# Altium PCB BLDC controller.PcbDoc (part 1 of 2)
Units mm, origin at the board's own origin, x right, y up, seen from the top; angles counter-clockwise.
Board outline 102.51 x 103.12 mm, 2 copper layers (Top Layer, Bottom Layer); 116 components, 83 nets, 325 pads, 163 vias.
Unrouted connection lines stored in the file: 1.
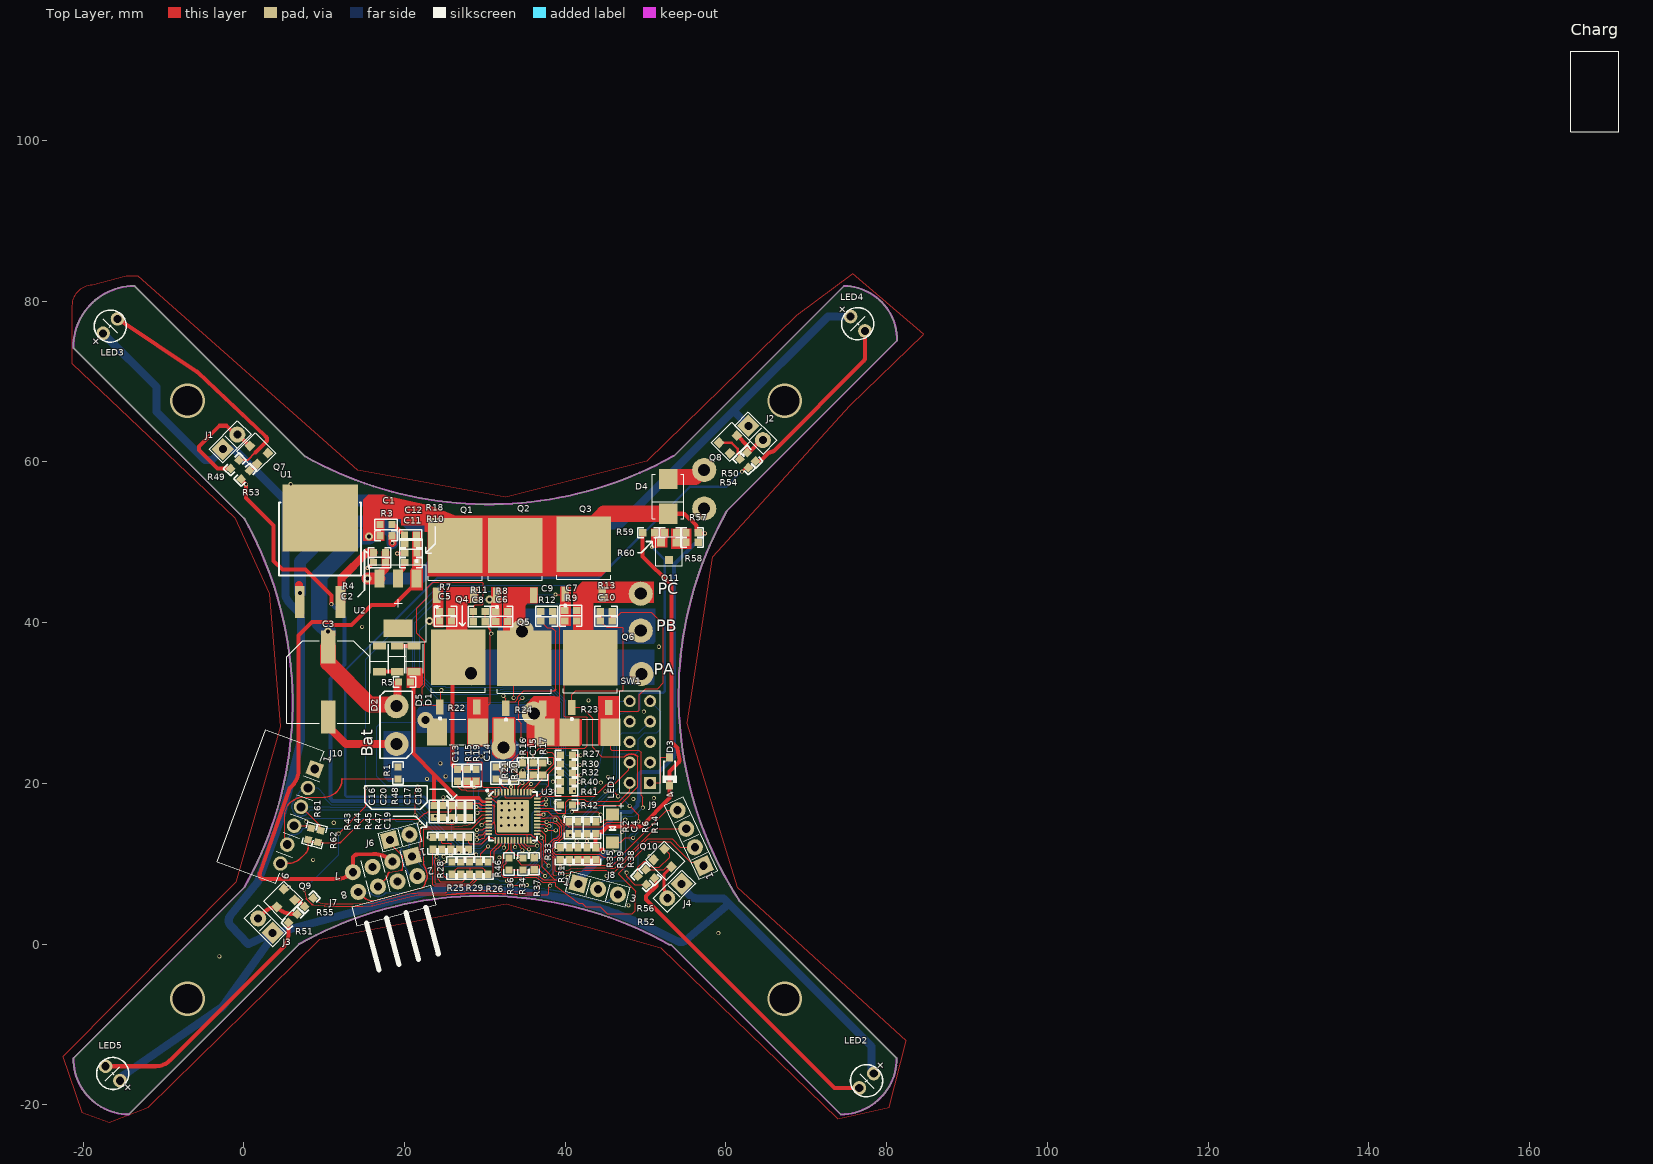
[diagram p0: Top Layer view]
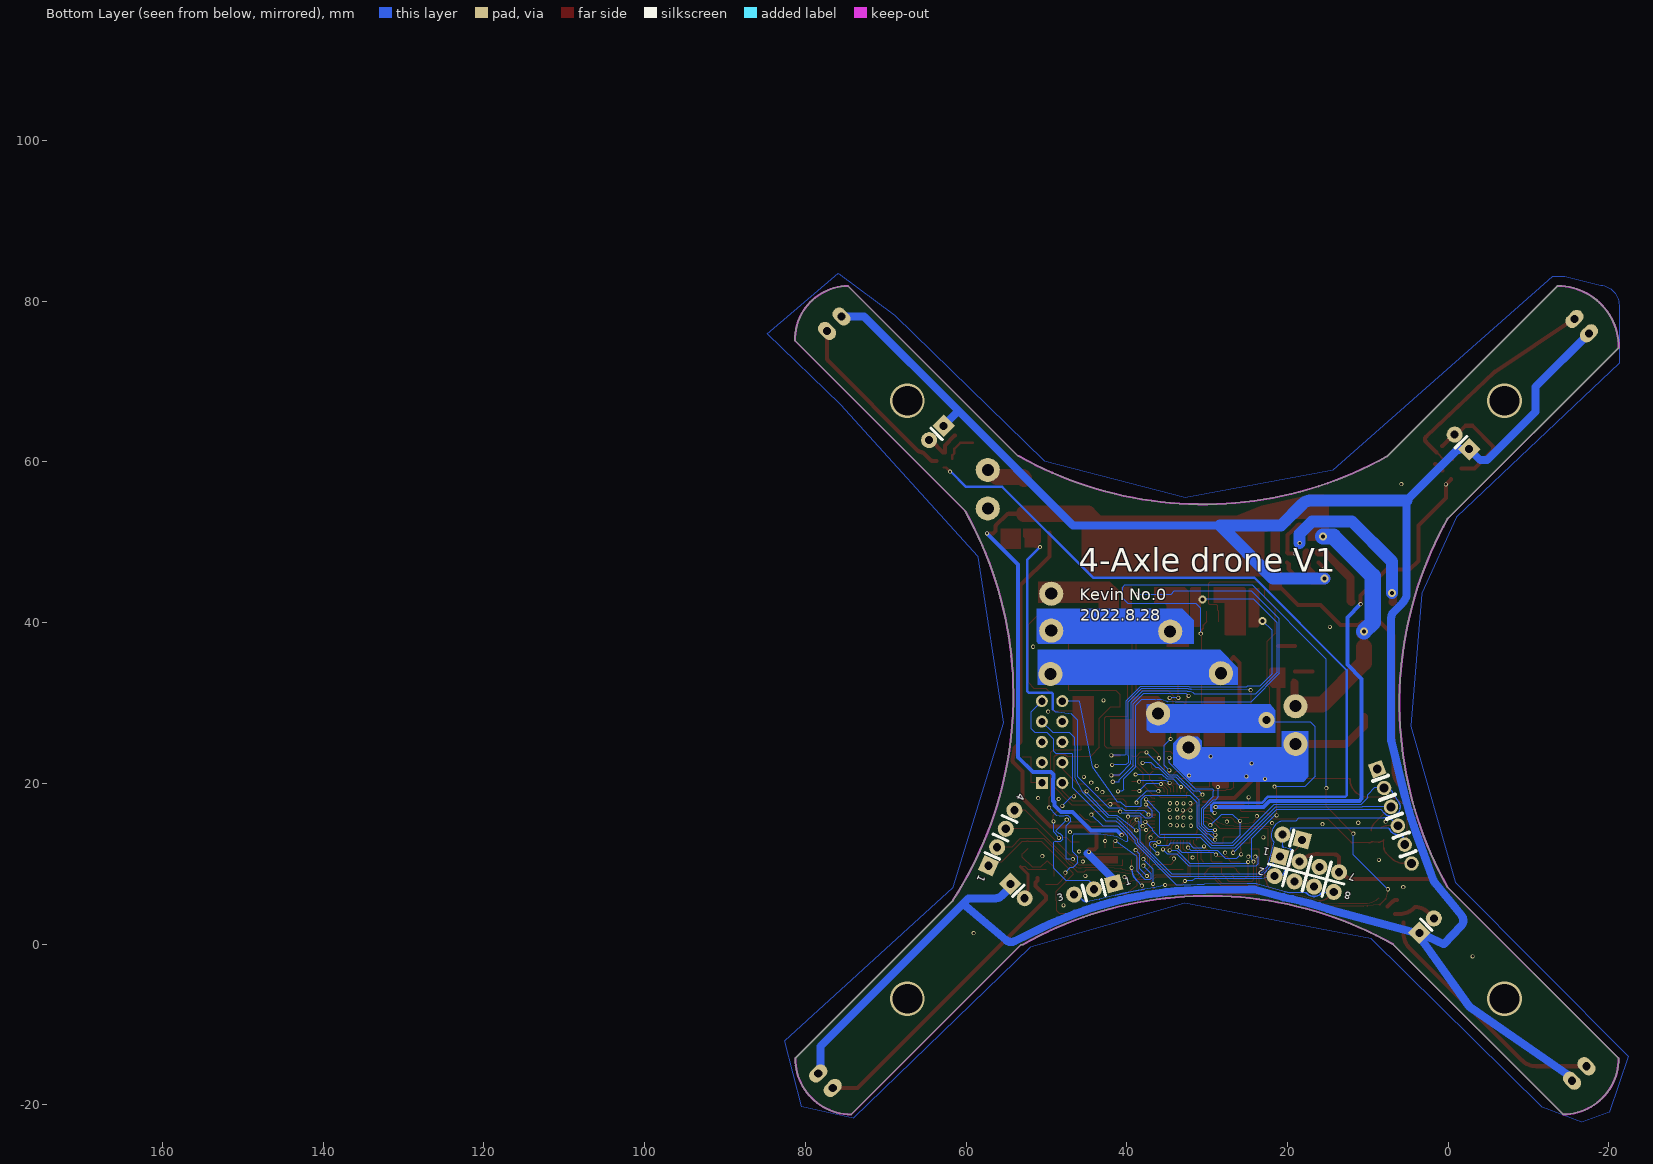
[diagram p1: Bottom Layer view, seen from below]

## Layer stack, top to bottom
Top Solder: solder mask 0.0102, Solder Resist, Dk 3.5
Top Layer: signal copper 0.0356
Dielectric 1: dielectric 0.32, FR-4, Dk 4.8
Bottom Layer: signal copper 0.0356
Bottom Solder: solder mask 0.0102, Solder Resist, Dk 3.5

## Board outline
-21.2,-14.2 ccw(c-14.25,-14.25) -14.3,-21.2 6.9,0 cw(c29.86,-40.866) 52.912,-0.052 53.152,-0.052 74.307,-21.207 ccw(c74.279,-14.236) 81.25,-14.208 61.648,5.394 61.648,5.446 cw(c100.987,30.935) 60.087,53.835 60.087,53.887 81.3,75.1 ccw(c74.6,75.2) 74.7,81.9 53.534,60.734 53.46,60.734 cw(c30.5,101.6) 7.6,60.7 -13.613,81.913 ccw(c-13.563,74.263) -21.213,74.213 0.053,52.947 0.066,52.96 cw(c-40.8,30) 0.1,7.1

## Design rules (kind name [scope] priority, off if disabled: settings)
Clearance [All] p1: gap=0.153 ignorepadtopadclearanceinfootprint=FALSE
DiffPairsRouting [All] p1: maxlimit=0.254 minlimit=0.254 mostfreqgap=0.254 toplayer_minwidth=0.381 toplayer_maxwidth=0.381 toplayer_prefwidth=0.381 bottomlayer_minwidth=0.381 bottomlayer_maxwidth=0.381 bottomlayer_prefwidth=0.381 substack1={16BC12FD-55DF-4440-831C-986EA8E48B1B} toplayer_{16bc12fd-55df-4440-831c-986ea8e48b1b}_minwidth=0.381 toplayer_{16bc12fd-55df-4440-831c-986ea8e48b1b}_maxwidth=0.381 toplayer_{16bc12fd-55df-4440-831c-986ea8e48b1b}_prefwidth=0.381 bottomlayer_{16bc12fd-55df-4440-831c-986ea8e48b1b}_minwidth=0.381 bottomlayer_{16bc12fd-55df-4440-831c-986ea8e48b1b}_maxwidth=0.381 bottomlayer_{16bc12fd-55df-4440-831c-986ea8e48b1b}_prefwidth=0.381 maxuncoupledlength=12.7
PlaneConnect [All] p1: planeconnectstyle=Direct reliefexpansion=0.508 reliefentries=4 reliefconductorwidth=0.254 reliefairgap=0.254
PolygonConnect [All] p1: connectstyle=Direct reliefconductorwidth=0.254 reliefentries=4 polygonreliefangle="90 Angle" airgapwidth=0.254
RoutingVias [All] p1: holewidth=0.711 width=1.27 viastyle="Through Hole" minholewidth=0.711 minwidth=1.27 maxholewidth=0.711 maxwidth=1.27
SolderMaskExpansion [All] p1: expansion=0.102 istentingtop=FALSE
Width [All] p1: maxlimit=10 minlimit=0.152 preferedwidth=0.254 substack1={16BC12FD-55DF-4440-831C-986EA8E48B1B} toplayer_{16bc12fd-55df-4440-831c-986ea8e48b1b}_minwidth=0.1 bottomlayer_{16bc12fd-55df-4440-831c-986ea8e48b1b}_minwidth=0.1
28 further rules are at their usual default settings.

## Classes and differential pairs
component class E-scooter: C1 C2 C3 C4 C5 C6 C7 C8 C9 C10 C11 C12 C13 C14 C15 C16 C17 C18 C19 C20 D1 D2 D5 LED1 Q1 Q2 Q3 Q4 Q5 Q6 R1 R2 R3 R4 R5 R6 R7 R8 R9 R10 R11 R12 R13 R14 R15 R16 R17 R18 R19 R20 R21 R22 R23 R24 R25 R26 R27 R28 R29 R30 R31 R32 R33 R34 R35 R36 R37 R38 R39 R40 R41 R42 R43 R44 R45 R46 R47 R48 U1 U2 U3
component class Connector: D3 D4 J1 J2 J3 J4 J6 J7 J8 J9 J10 LED2 LED3 LED4 LED5 Q7 Q8 Q9 Q10 Q11 R49 R50 R51 R52 R53 R54 R55 R56 R57 R58 R59 R60 R61 R62 SW1

## Components (designator, comment, footprint, x,y, rotation, side; value= is the part's Value field where it differs from the comment)
C1 "PXL456470-1530" CAPC0603-RW 17.7,52.2 r0 top
C2 "PXL456470-1530" CAPC0603-RW 16.9,47.5 r180 top
C3 "PBE099550-4710" "CASE - G" 10.5,32.6 r90 top
C4 "PXL456470-1530" CAPC0603-RW 41.6,14.475 r270 top
C5 "PXL456470-1530" CAPC0603-RW 25.1,40.2 r180 top
C6 "PXL456470-1530" CAPC0603-RW 32.1,40.15 r180 top
C7 "PXL456470-1530" CAPC0603-RW 40.7,41.5 r180 top
C8 "PXL456470-1530" CAPC0603-RW 29.3,40.1 r180 top
C9 "PXL456470-1530" CAPC0603-RW 37.7,41.4 r180 top
C10 "PXL456470-1530" CAPC0603-RW 45.1,40.2 r180 top
C11 "PXL456470-1530" CAPC0603-RW 20.8,49.8 r180 top
C12 "PXL456470-1530" CAPC0603-RW 20.75,50.9 r180 top
C13 "PXL456470-1530" CAPC0603-RW 26.6,21 r270 top
C14 "PXL456470-1530" CAPC0603-RW 31.4,21.3 r270 top
C15 "PXL456470-1530" CAPC0603-RW 36.025,21.775 r270 top
C16 "PXL456470-1530" CAPC0603-RW 23.7,16.5 r90 top
C17 "PXL456470-1530" CAPC0603-RW 27,16.5 r90 top
C18 "PXL456470-1530" CAPC0603-RW 28.1,16.5 r90 top
C19 "PXL456470-1530" CAPC0603-RW 27.95,12.55 r90 top
C20 "PXL456470-1530" CAPC0603-RW 24.8,16.5 r270 top
D1 "RCZ005022-0010" LL34 21.2,35.5 r270 top
D2 "RCZ005022-0010" LL34 16.9,35.5 r270 top
D3 "1N5819" SOD-123-L 53,21.5 r270 top
D4 "RCD102100-0110" SMB 52.8,55.7 r270 top
D5 "RCZ005022-0010" LL34 19.1,35.5 r90 top
J1 "CCH254020-0102" "HOUSING 2P PH=2.54mm Jumper" -1.7,62.5 r45 top
J2 "CCH254020-0102" "HOUSING 2P PH=2.54mm Jumper" 63.7,63.6 r315 top
J3 "CCH254020-0102" "HOUSING 2P PH=2.54mm Jumper" 2.7,2.3 r135 top
J4 "CCH254020-0102" "HOUSING 2P PH=2.54mm Jumper" 53.602,6.602 r225 top
J6 "CCH254020-0102" "HOUSING 2P PH=2.54mm Jumper" 19.4,13.3 r15 top
J7 "WIFI" "HEAD 8P 2X4 PH=2.54mm 90 H5mm_2.54-2X4AW-10.4" 17.6,8.7 r195 top
J8 "CCP254010-0103" "HEAD 3P PH=2.54mm 180" 44.1,6.825 r345 top
J9 "CCP254260-0104" "HEAD 4P PH=2.54mm 180" 55.6,13.2 r115 top
J10 "T690300121600" "CONN 6P PH=2.5mm RA XHB-6AW-KL" 6.7,15.9 r70 top
LED1 "LED1206R_23-21\R6C-AM1N2AY\2A" LED1206-RED 45.9,14.4 r270 top
LED2 "KED200001-0010" "3mm LED-R" 77.5,-17 r225 top
LED3 "KED200001-0010" "3mm LED-R" -16.602,76.898 r45 top
LED4 "KED200001-0010" "3mm LED-R" 76.4,77.2 r315 top
LED5 "KED200001-0010" "3mm LED-R" -16.3,-16.1 r135 top
Q1 "T5860038503A6" TO252-3 26.3,47.75 r90 top
Q2 "T5860038503A6" TO252-3 33.8,47.75 r90 top
Q3 "T5860038503A6" TO252-3 42.3,47.9 r90 top
Q4 "T5860038503A6" TO252-3 26.7,33.85 r90 top
Q5 "T5860038503A6" TO252-3 34.9,33.7 r90 top
Q6 "T5860038503A6" TO252-3 43.1,33.8 r90 top
Q7 "MMBT4401" SOT23-132-RW 1.55,61.206 r45 top
Q8 "MMBT4401" SOT23-132-RW 60.6,62.5 r315 top
Q9 "MMBT4401" SOT23-132-RW 4.9,5.4 r135 top
Q10 "MMBT4401" SOT23-132-RW 52.45,10.394 r225 top
Q11 "RCP003906-0002" SOT23-132-RW 52.9,48.9 r180 top
R1 "T502210202399" 0603-RW 19.2,21.3 r270 top
R2 "T5024421083A9" 0603 40.5,14.475 r90 top
R3 "T502210202399" 0603-RW 17.7,50.8 r0 top
R4 "T502210202399" 0603-RW 16.9,48.7 r0 top
R5 "T502210202399" 0603-RW 20,32.6 r0 top
R6 "T5024421083A9" 0603 42.7,14.475 r270 top
R7 "T5024421083A9" 0603 25.1,41.4 r180 top
R8 "T5024421083A9" 0603 32.1,41.4 r180 top
R9 "T5024421083A9" 0603 40.7,40.2 r180 top
R10 "T5024421083A9" 0603 20.8,47.5 r180 top
R11 "T5024421083A9" 0603 29.3,41.4 r180 top
R12 "T5024421083A9" 0603 37.7,40.2 r180 top
R13 "T5024421083A9" 0603 45.1,41.4 r180 top
R14 "T5024421083A9" 0603 43.8,14.475 r90 top
R15 "T5024421083A9" 0603 27.8,21 r90 top
R16 "T5024421083A9" 0603 34.675,21.8 r270 top
R17 "T5024421083A9" 0603 37.2,21.8 r270 top
R18 "T5024421083A9" 0603 20.8,48.7 r0 top
R19 "T5024421083A9" 0603 28.9,21 r90 top
R20 "T5024421083A9" 0603 33.6,21.3 r270 top
R21 "T5024421083A9" 0603 32.5,21.3 r270 top
R22 "QCF101250-1009" 2512 26.6,26.4 r0 top
R23 "QCF101250-1009" 2512 43.1,26.375 r0 top
R24 "QCF101250-1009" 2512 34.9,26.4 r0 top
R25 "T5024421083A9" 0603 27,9.45 r90 top
R26 "T5024421083A9" 0603 29.3,9.45 r90 top
R27 "T5024421083A9" 0603 40.15,23.5 r180 top
R28 "T5024421083A9" 0603 25.9,9.45 r270 top
R29 "T5024421083A9" 0603 28.1,9.45 r270 top
R30 "T5024421083A9" 0603 40.15,22.4 r180 top
R31 "T5024421083A9" 0603 40.5,11.25 r270 top
R32 "T5024421083A9" 0603 40.15,21.3 r180 top
R33 "T5024421083A9" 0603 39.4,11.25 r270 top
R34 "T5024421083A9" 0603 34.75,9.975 r270 top
R35 "T5024421083A9" 0603 41.6,11.25 r270 top
R36 "T5024421083A9" 0603 33,9.975 r90 top
R37 "T5024421083A9" 0603 36.15,10 r270 top
R38 "T5024421083A9" 0603 43.8,11.25 r90 top
R39 "T5024421083A9" 0603 42.7,11.25 r270 top
R40 "T5024421083A9" 0603 40.15,20.2 r180 top
R41 "T5024421083A9" 0603 40.15,19.1 r180 top
R42 "T5024421083A9" 0603 40.15,17.3 r180 top
R43 "T5024421083A9" 0603 23.55,12.55 r90 top
R44 "T5024421083A9" 0603 24.65,12.55 r270 top
R45 "T5024421083A9" 0603 25.75,12.55 r270 top
R46 "T5024421083A9" 0603 30.4,9.45 r270 top
R47 "T5024421083A9" 0603 26.85,12.55 r90 top
R48 "T5024421083A9" 0603 25.9,16.5 r90 top
R49 "T5024421083A9" 0603 -1.1,59.7 r225 top
R50 "T5024421083A9" 0603 63.17,60.63 r135 top
R51 "T5024421083A9" 0603 6.1,3.2 r45 top
R52 "T5024421083A9" 0603 50.57,8.73 r135 top
R53 "T5024421083A9" 0603 0.2,58.4 r45 top
R54 "T5024421083A9" 0603 62.27,59.83 r135 top
R55 "T5024421083A9" 0603 8.1,5.2 r225 top
R56 "T5024421083A9" 0603 49.57,7.93 r135 top
R57 "T5024421083A9" 0603 55.8,51.2 r180 top
R58 "T5024421083A9" 0603 55.8,50 r180 top
R59 "T5024421083A9" 0603 50.4,51.2 r180 top
R60 "T5024421083A9" 0603 53.1,51.2 r180 top
R61 "T5024421083A9" 0603 8.2,13.7 r255 top value=4.7k
R62 "T5024421083A9" 0603 9.4,13.4 r255 top value=4.7k
SW1 "Header 5X2" HDR2X5 50.569,20.071 r90 top
U1 "7805" TO-263 9.5,47.8 r0 top
U2 "AMS1117" SOT223 19.2,42.4 r180 top
U3 "MM32SPIN360C" QFN48-6x6 33.5,15.9 r0 top locked

## Footprints (in the part's own frame and the unit in brackets; to place one, negate y for a bottom-side part, rotate by r counter-clockwise, add the part's x,y. Pads: shape width x height; smd on the part's side, far side on the other; paste and mask are expansions set on the pad)
"3mm LED-R" [mm] "LED DIP Pitch 2.54mm RED"
  round 1.7 / inner round 1.7 / far side oval 1.7x2.5 hole 1.016 paste+0 mask+0.05: 1(-1.27,0)
  round 1.7 / inner round 1.7 / far side oval 1.7x2.5 hole 1.016 mask+0.05: 2(1.27,0)
  silkscreen extent -2,-2 2,2, body extent -1.97,-1.98 1.51,2, height 6.2
0603 [mm]
  rect 0.9x0.9 smd: 1(-0.75,0) 2(0.75,0)
  silkscreen extent -1.39,-0.63 1.39,0.65, body extent -0.8,-0.4 0.8,0.4, height 0.8
0603-RW [mm]
  rect 0.9x0.9 smd mask+0.05: 1(-0.75,0) 2(0.75,0)
  silkscreen extent -1.39,-0.64 1.39,0.64, body extent -0.8,-0.41 0.8,0.39, height 0.3
2512 [mm] "Chip Resistor; Body 6.4 x 3.2 mm (LxW typ)"
  rect 2.5x3.4 smd mask+0.05: 1(-2.55,0) 2(2.55,0)
  silkscreen extent -1,-1.6 1,1.6, body extent -3.17,-1.5 3.18,1.5, height 1.6
CAPC0603-RW [mm] "Body size:  L1.6XW0.8XT0.8mm"
  rect 0.9x0.9 smd mask+0.05: 1(-0.75,0) 2(0.75,0)
  silkscreen extent -1.39,-0.64 1.39,0.64, body extent -0.8,-0.4 0.8,0.4, height 0.8
"CASE - G" [mm] "CHIP ELECT CAP D10mm * H10.2mm"
  rect 4.1x1.8 smd mask+0.05: 1(4.35,0) 2(-4.35,0)
  silkscreen extent -5.15,-5.15 5.15,5.15, body extent -5.87,-5.17 5.73,5.13, height 10.2
"CONN 6P PH=2.5mm RA XHB-6AW-KL" [mm] "WAFER 6P XHB-6AW-KL"
  rect 1.8x1.8 hole 1.1: 1(6.25,0)
  round 1.8 hole 1.1: 2(3.75,0) 3(1.25,0) 4(-1.25,0) 5(-3.75,0) 6(-6.25,0)
  silkscreen extent -8.75,-1.11 8.75,7.43, body extent -8.75,-0.31 8.75,7.42, height 6.56
HDR2X5 [mm]
  rect 1.5x1.5 hole 0.9: 1(0,0)
  round 1.5 hole 0.9: 2(0,2.54) 3(2.54,0) 4(2.54,2.54) 5(5.08,0) 6(5.08,2.54) 7(7.62,0) 8(7.62,2.54) 9(10.16,0) 10(10.16,2.54)
  silkscreen extent -1.27,-1.27 11.43,3.81, body extent -1.27,-1.27 11.43,3.81, height 8.54
"HEAD 3P PH=2.54mm 180" [mm] "HEAD 3P PH=2.54mm 180 H8.6mm"
  rect 2x2 hole 1: 1(-2.54,0)
  round 2 hole 1: 2(0,0) 3(2.54,0)
  silkscreen extent -3.81,-1.27 3.81,1.27, body extent -3.81,-1.24 3.81,1.3, height 8.87
"HEAD 4P PH=2.54mm 180" [mm] "HEAD 4P PH=2.54mm 180 H8.6mm"
  rect 2x2 hole 1: 1(-3.81,0)
  round 2 hole 1: 2(-1.27,0) 3(1.27,0) 4(3.81,0)
  silkscreen extent -5.08,-1.27 5.08,1.27, body extent -5.08,-1.27 5.08,1.27, height 8.57
"HEAD 8P 2X4 PH=2.54mm 90 H5mm_2.54-2X4AW-10.4" [mm] "HEAD 8P 2X4 PH=2.54mm 90 H5mm"
  rect 2x2 hole 1: 1(-3.81,-1.27)
  round 2 hole 1: 2(-3.81,1.27) 3(-1.27,-1.27) 4(-1.27,1.27) 5(1.27,-1.27) 6(1.27,1.27) 7(3.81,-1.27) 8(3.81,1.27)
  silkscreen extent -5.08,-2.38 5.08,11.31, body extent -5.08,-1.6 5.08,11.42, height 5.2
"HOUSING 2P PH=2.54mm Jumper" [mm] "HOUSING 2P PH=2.54mm Jumper H8.5mm"
  rect 2x2 hole 1: 1(-1.27,0)
  round 2 hole 1: 2(1.27,0)
  silkscreen extent -2.5,-1.2 2.5,1.2
LED1206-RED [mm]
  rect 1.5x1.6 smd mask+0.05: 1(-1.75,0) 2(1.75,0)
  silkscreen extent -3.1,-1.07 2.8,1.38, body extent -1.61,-0.79 1.61,0.81, height 1.1
LL34 [mm] "LL34 D1.5mm L 3.5mm Max"
  rect 0.9x1.6 smd: 1(-1.6,0) 2(1.6,0)
  silkscreen extent -1.8,-1.14 1.8,1.14, body extent -1.8,-0.75 1.8,0.75, height 1.56
QFN48-6x6 [mm]
  rrect5% 4x4 smd paste+0 mask+0.05: 0(0,0)
  rrect50% 0.8x0.23 smd paste+0 mask+0.05: 1(-3,2.2) 2(-3,1.8) 3(-3,1.4) 4(-3,1) 5(-3,0.6) 6(-3,0.2) 7(-3,-0.2) 8(-3,-0.6) 9(-3,-1) 10(-3,-1.4) 11(-3,-1.8) 12(-3,-2.2) 25(3,-2.2) 26(3,-1.8) 27(3,-1.4) 28(3,-1) 29(3,-0.6) 30(3,-0.2) 31(3,0.2) 32(3,0.6) 33(3,1) 34(3,1.4) 35(3,1.8) 36(3,2.2)
  rrect50% 0.23x0.8 smd paste+0 mask+0.05: 13(-2.2,-3) 14(-1.8,-3) 15(-1.4,-3) 16(-1,-3) 17(-0.6,-3) 18(-0.2,-3) 19(0.2,-3) 20(0.6,-3) 21(1,-3) 22(1.4,-3) 23(1.8,-3) 24(2.2,-3) 37(2.2,3) 38(1.8,3) 39(1.4,3) 40(1,3) 41(0.6,3) 42(0.2,3) 43(-0.2,3) 44(-0.6,3) 45(-1,3) 46(-1.4,3) 47(-1.8,3) 48(-2.2,3)
  silkscreen extent -3.32,-3 3,3.32, body extent -3.02,-3.02 3.02,3.02, height 0.65
SMB [mm] "SMB Body W 3.94mm L 4.70mm Max"
  rect 2.5x2.3 smd: 1(-2.15,0) 2(2.15,0)
  silkscreen extent -2.79,-1.98 2.79,1.98, body extent -2.7,-1.8 2.7,1.8, height 2.27
SOD-123-L [mm]
  rect 1x0.85 smd: A(-1.75,0) K(1.75,0)
  silkscreen extent -1.32,-0.9 1.48,0.9, body extent -1.85,-0.8 1.85,0.8, height 1.2
SOT23-132-RW [mm]
  rect 1x1 smd: 1(-0.95,-1.1) 2(0.95,-1.1) 3(0,1.1)
  silkscreen extent -1.65,-1.79 1.65,1.79, body extent -1.46,-1.17 1.46,1.17, height 1
SOT223 [mm]
  rect 1.2x2.2 smd: 1(-2.3,-3.1) 2(0,-3.1) 3(2.3,-3.1)
  rect 3.6x2.2 smd: 4(0,3.1)
  silkscreen extent -3.5,-5.37 3.5,4.8, body extent -3.35,-3.6 3.35,3.6, height 1.86
TO252-3 [mm] "D-PAK, 3-Leads, Body 6.5x7.0mm, Pitch 2.3mm, Lead Span 9.7mm, IPC Medium Density"
  rect 1.9x0.95 smd: 1(-4.35,2.3) 3(-4.35,-2.3)
  rect 6.9x6.8 smd: 4(1.85,0)
  silkscreen extent -5.87,-3.35 -2,3.35, body extent -4.8,-3.24 5.14,3.3, height 2.39
TO-263 [mm]
  rect 1.22x4 smd: 1(-2.54,-5.232) 3(2.54,-5.232)
  rect 9.4x8.3 smd: 4(0,5.232)
  silkscreen extent -5.1,-1.94 5.1,7.16, body extent -5.08,-6.59 5.08,8.67, height 4.98

## Part data
C1 C2 C4 C5 C6 C7 C8 C9 C10 C11 C12 C13 C14 C15 C16 C17 C18 C19 C20: library part "CAP0603 0.015uF 50V 10%", "GP CHIP CAP 0.015uF 50V 10% 0603 TYPE X7R"
C3: library part "CAP E 470uF 25V 20% SMD", "CHIP ELECT 470uF 25V 20% D10xL10 105"
D1 D2 D5: library part ZMM55-C22-10020343, "CHIP ZENER 22V 5% 0.5W MLL34"
D3: library part Diode, "普通二极管 Diode"
D4: library part SS210, "SWITC 100V 2A SS210 MIC G"
J1 J2 J3 J4 J6: library part "HOUSING 2P PH=2.54mm Jumper", "HOUSING SIL Jumper 2P 90059-1007 Molex"
J7: library part "HEAD 8P 2X4 PH=2.54mm 90 H5mm_2.54-2X4AW-10.4", "2X4P P:2.54MM 90° DIP K"
J8: library part "HEAD 3P PH=2.54mm 180", "HEAD PIN 3P P2.54*H11.6MM"
J9: library part "HEAD 4P PH=2.54mm 180 H11.5mm", "HEAD PIN 4P P2.54xH11.5MM"
J10: library part "CONN PH 6P PH=2.5mm RA XHB-6AW-KL", "CONNECTOR 6PIN P=2.5 WHITE 90 K"
LED1: "CHIP LED RED TYPE 1206"
LED2 LED3 LED4 LED5: library part FH-F303DNREH, "RED LED 2PIN 3 HIGH LIGHT FH-F303DNREH"
Q1 Q2 Q3 Q4 Q5 Q6: library part "NMOS LSG60R240HT", "NMOS 600V LSG60R240HT TO252( LONTEN K"
Q7 Q8 Q9 Q10: "NPN 40V MMBT4401 SOT23 FAIRCH K"
Q11: library part LMBT3906LT1G_LRC, "PNP 40V LMBT3906LT1G SOT23 LRC L"
R1 R3 R4 R5: library part "RES0603 1/16W 1% 21K OMH_WALSIN", "CHIP 21K OHM 100PPM +-1% 0603 WALS L"
R2 R6 R7 R8 R9 R10 R11 R12 R13 R14 R15 R16 R17 R18 R19 R20 R21 R25 R26 R27 R28 R29 R30 R31 R32 R33 R34 R35 R36 R37 R38 R39 R40 R41 R42 R43 R44 R45 R46 R47 R48 R49 R50 R51 R52 R53 R54 R55 R56 R57 R58 R59 R60: library part "RES0201 1/20W 1% 4.42K OHM_WALSIN", "CHIP 4.42K OHM 200PPM +-1% 0201 WALS L"
R22 R23 R24: library part "RES2512 1W 1% 10 OHM", "CHIP RES. 10 OHM 1W 1% 2512"
R61 R62: library part "RES0201 1/20W 1% 4.42K OHM_WALSIN", "CHIP 4.42K OHM 200PPM +-1% 0201 WALS L", PACKAGE=0603, Power=1/20W, CREATE_NAME=Nathan, CREATE_TIME=23-July-2019, Customer Specific=N/A, DIP&SMD=SMD, MFG="WALSIN (華新)", MFG Part=WR02X4421FAL, SAP=T5024421083A9, TOL=1%, Type=Resistor
SW1: "Header, 5-Pin, Dual row"
U2: "800mA LOW DROPOUT VOLTAGE REGULATOR , SOT-223"

## Free pads (board coordinates)
  round 3 hole 1.5: 4(57.3,54.2) 5(57.3,59) 10(28.3,33.7) 10(32.312,24.463) 10(34.6,38.9) 10(36.1,28.7) 10(49.5,33.6) 11(49.4,39) 12(49.4,43.6) 13(19,29.6) 15(19,24.9)

## Via types
v1: diameter 0.5, hole 0.3, Top Layer to Bottom Layer, tented bottom, 152 vias
v2: diameter 1, hole 0.5, Top Layer to Bottom Layer, tented bottom, 6 vias
v3: diameter 4.3, hole 3.7, Top Layer to Bottom Layer, tented bottom, 4 vias
v4: diameter 2, hole 1, Top Layer to Bottom Layer, tented bottom, 1 vias

## Nets (pads, with @x,y where several pads share a name; then routed paths per layer and width w, separated by ;. In a path a pad name is that pad's centre, name@x,y a point inside that pad or via, vN(x,y) a via of type N, cw(c..) or ccw(c..) an arc to the next point about the centre after c; other vN are vias at no path point)
3.3V: C11.1 C12.1 J7.3 J7.7 R10.1 R18.2 U2.1 | length 68.3
  Top Layer w0.5: J7.3@18.498,10.255 ccw(c16.179,7.936) 16.188,11.216 ccw(c16.179,7.936) 16.179,11.216 16.171,11.216 ccw(c16.187,10.716) 16.169,11.216 14.076,11.145 ccw(c14.091,10.646) 13.591,10.646 J7.7@13.591,8.941 cw(c11.562,10.97) 11.562,8.1 2.465,8.1 cw(c2.465,8.6) 1.992,8.764 1.993,8.765 5.681,19.311 cw(c6.153,19.146) 5.8,19.5 6.056,19.756 ccw(c4.26,21.552) 6.8,21.552 6.8,38.4 8.5,40.1 10.75,40.1 11.15,39.7 13.4,39.7 15.875,42.175 18.675,42.175 21.5,45 U2.1@21.5,45.5
5V: C2.1 J1.1 J2.1 J3.1 J4.1 LED2.1 LED3.1 LED4.1 LED5.1 R4.2 U2.3 | length 324.4
  Top Layer w1: U2.3@16.9,45.5 16.9,46 17.65,46.75 C2.1@17.65,47.5 R4.2@17.65,48.7
  Top Layer w1.5: v2(15.4,45.5) U2.3@16.9,45.5
  Bottom Layer w1: LED3.1@-17.5,76 -10.844,69.344 -10.844,66.244 -4.814,60.214 -3.986,60.214 J1.1@-2.598,61.602 -1.618,61.602 -0.905,61.305 5.2,55.2 ; LED5.1@-15.402,-16.998 -15.394,-16.955 cw(c-14.411,-17.136) -14.977,-16.312 -2.763,-7.892 ccw(c-3.331,-7.069) -2.516,-7.649 1.997,-1.303 J3.1@3.42,0.698 ; 1.858,7.959 cw(c0.918,8.301) 1.693,7.669 -1.645,3.58 ccw(c-0.87,2.948) -1.597,2.261 0.538,0.001 J3.1@3.598,1.402 3.716,1.334 14.618,4.252 15.024,4.385 15.027,4.386 cw(c29.86,-40.866) 20.466,5.82 ccw(c20.284,6.721) 20.525,5.833 24.179,6.812 24.725,6.812 30.344,6.753 cw(c29.86,-40.866) 37.466,6.144 cw(c29.86,-40.866) 50.691,1.958 50.694,1.956 53.927,0.385 ccw(c54.391,1.271) 55.036,0.507 60.381,5.019 ; 1.858,7.959 3.953,13.721 ccw(c-40.8,30) 5.432,18.58 7.071,25.207 ccw(c6.1,25.448) 7.1,25.448 7.1,40.586 ccw(c6.1,40.586) 6.806,41.294 5.929,42.171 cw(c8.389,44.631) 5.311,43.009 cw(c6.196,43.475) 5.196,43.475 5.196,55.204 ; 28.4,52.1 46.7,52.1 60.9,66.3 ; J4.1@54.254,7.346 55.607,5.993 ccw(c56.314,6.7) 56.314,5.7 59.7,5.7 60.381,5.019 ; J2.1@62.802,64.498 61,66.3 60.9,66.3 ; LED4.1@75.502,78.098 72.698,78.098 60.9,66.3 ; LED2.1@78.398,-16.102 78.115,-15.819 78.115,-12.715 60.381,5.019
  Bottom Layer w1.5: 5.2,55.2 17.079,55.2 cw(c17.079,53.7) 18.139,54.761 20.8,52.1 28.4,52.1 21.8,45.5 v2(15.4,45.5)
A0: R15.1 R19.1 U3.10 | length 10.1
  Top Layer w0.15: R15.1@27.8,20.25 R19.1@28.9,20.25 ; v1(29.022,14.222) 29.045,14.2 29.733,14.2 29.938,14.405 30.048,14.405 30.103,14.46 30.46,14.46 U3.10@30.5,14.5
  Bottom Layer w0.15: v1@28.6,19.55 28.6,18.347 29.025,17.922 29.315,17.922 30.45,16.787 30.45,14.848 29.806,14.204 29.041,14.204 v1(29.022,14.222)
  other v1: 28.675,19.55
A1: R16.1 R20.1 U3.11 | length 18.2
  Top Layer w0.12: 29.235,13.625 29.74,13.625 29.92,13.805 29.92,13.856 30.059,13.995 30.11,13.995 30.215,14.1 U3.11@30.5,14.1 ; R20.1@33.6,22.05 33.875,22.325 34.475,22.325 34.7,22.55 v1(34.7,23.175)
  Bottom Layer w0.12: v1(28.973,13.604) 28.994,13.626 29.051,13.626 29.374,13.949 29.912,13.949 30.705,14.742 30.705,16.895 29.225,18.375 29.225,19.025 29.175,19.075 29.175,19.146 29.283,19.255 31.41,19.255 34.7,22.545 v1(34.7,23.175)
A2: R17.1 R21.1 U3.12 | length 26
  Top Layer w0.15: v1(29,12.985) 29.035,13.02 29.475,13.02 29.65,13.195 29.903,13.195 29.991,13.283 29.991,13.476 30.215,13.7 U3.12@30.5,13.7 ; R21.1@32.5,22.05 32.675,22.225 32.675,22.675 33.049,22.675 33.069,22.695 33.295,22.695 34.525,23.925 35.25,23.925 35.32,23.855 35.32,22.019 35.3,21.999 35.3,21.775 36.7,21.775 36.888,21.963 36.888,22.238 R17.1@37.2,22.55 v1(38.025,22.55)
  Bottom Layer w0.15: v1(29,12.985) 29.005,12.985 29.714,13.694 30.017,13.694 30.983,14.659 30.983,17.901 33.824,20.743 34.849,20.743 36.032,21.925 36.35,21.925 36.975,22.55 v1(38.025,22.55)
A3: C19.2 R45.1 R47.2 U3.13 | length 6.9
  Top Layer w0.12: R45.1@25.75,13.3 R47.2@26.85,13.3 C19.2@27.95,13.3
  Top Layer w0.15: C19.2@27.95,13.3 27.999,13.251 27.999,12.592 28.116,12.475 29.6,12.475 30.4,13.275 30.925,13.275 31.047,13.153 31.285,13.153 31.3,13.138 U3.13@31.3,12.9
A4: R46.1 U3.14 | length 3.2
  Top Layer w0.15: R46.1@30.4,10.2 30.75,10.55 30.75,11.553 31.685,12.488 31.685,12.885 U3.14@31.7,12.9
A5: R43.1 R44.2 U3.15 | length 18.6
  Top Layer w0.15: R44.2@24.65,11.8 R43.1@23.55,11.8 23.55,10.577 23.52,10.548 23.52,9.955 23.55,9.926 23.55,7.411 23.716,7.245 28.227,7.245 29.037,8.055 30.931,8.055 31.045,8.169 31.045,10.295 31.2,10.45 31.2,11.55 32.035,12.385 32.035,12.55 32.085,12.6 32.085,12.885 U3.15@32.1,12.9
A6: R44.1 R45.2 U3.16 | length 11.3
  Top Layer w0.12: R44.1@24.65,13.3 24.65,12.595 24.72,12.525 25.73,12.525 25.8,12.455 25.8,11.8 R45.2@25.775,11.775
  Top Layer w0.15: v1(25.775,11.175) R45.2@25.775,11.775 ; 32.5,12.22 U3.16@32.5,12.9
  Bottom Layer w0.15: v1(25.775,11.175) 25.825,11.175 26.375,10.625 27.7,10.625 28.705,11.63 32.005,11.63 v1(32.375,12)
A7: J9.1 U3.17 | length 42.5
  Top Layer w0.15: U3.17@32.9,12.9 32.9,12.615 32.99,12.525 32.99,12.247 32.985,12.242 32.985,11.886 32.3,11.201 32.3,10.153 32.085,9.938 32.085,8.582 32.367,8.3 36.416,8.3 37.187,7.706 38.683,7.706 38.771,7.618 38.78,7.373 38.78,7.338 38.78,7.263 41.68,5.075 42.15,5.075 42.566,4.659 44.344,4.659 45.252,3.75 48.35,3.75 48.738,4.138 48.78,6.595 48.735,6.64 46.675,8.7 46.675,8.825 50.596,12.746 52.216,12.746 52.249,12.779 52.438,12.779 52.471,12.746 53.054,12.746 55.644,10.156 56.801,10.156 J9.1@57.21,9.747
A9: J9.2 J10.3 R62.1 U3.29 | length 68.1
  Top Layer w0.15: J10.3@7.128,17.075 9.252,14.95 ; U3.29@36.5,15.3 37.459,15.3 ; v1(37.7,15.2) 37.767,15.133 38.502,15.133 38.6,15.035 38.838,15.035 39.315,14.558 39.315,13.565 38.935,13.185 38.646,13.185 37.915,12.454 37.915,11.292 38.485,10.722 38.485,8.638 38.551,8.573 38.657,8.574 42.526,9.198 42.538,9.2 45.121,9.2 45.381,8.94 46.09,8.94 46.949,9.799 47.042,9.799 47.5,10.257 47.5,10.303 50.278,13.082 53.299,13.082 54.332,12.049 J9.2@56.137,12.049
  Top Layer w0.2: 9.252,14.95 cw(c8.427,14.124) R62.1@9.594,14.124 ; 37.459,15.3 cw(c37.459,14.959) v1(37.7,15.2)
  Bottom Layer w0.15: J10.3@7.128,17.075 10.706,17.075 10.746,17.035 21.543,17.035 26.653,11.925 29.5,11.925 30.83,13.255 35.89,13.255 36.766,14.131 36.766,14.266 v1(37.7,15.2)
A10: J9.3 J10.4 R61.1 U3.30 | length 73.1
  Top Layer w0.15: J10.4@6.272,14.725 7.668,14.725 ; U3.30@36.5,15.7 37.071,15.7 37.116,15.655 37.484,15.655 37.529,15.7 38.704,15.7 38.717,15.687 38.717,15.547 v1(38.784,15.48) ; v1@38.855,15.48 38.855,15.4 39.585,14.67 39.585,13.453 39.047,12.915 38.757,12.915 38.485,12.643 38.485,12.296 38.185,11.996 38.185,11.404 38.755,10.834 38.755,9.18 38.843,9.092 39.182,9.042 39.637,9.061 40.482,9.222 40.495,9.233 40.665,9.403 42.412,9.503 45.246,9.503 45.253,9.497 45.639,9.447 46.014,9.447 46.212,9.491 46.823,10.102 46.917,10.102 47.197,10.382 47.197,10.429 51.119,14.351 J9.3@55.063,14.351
  Top Layer w0.2: 7.668,14.725 cw(c7.668,13.698) R61.1@8.394,14.424
  Bottom Layer w0.15: J10.4@6.272,14.725 7.141,15.594 ccw(c7.128,17.075) 7.686,15.703 7.998,15.703 8.039,15.662 18.638,15.662 19,15.3 20.825,15.3 cw(c20.825,14.915) 21.027,15.243 cw(c19.956,13.526) 21.93,13.97 cw(c20.303,13.604) 21.708,12.705 21.725,12.643 22.517,9.688 22.527,9.649 22.555,9.621 22.555,9.583 22.599,9.539 cw(c21.609,8.459) 22.828,9.272 23.425,8.675 34.341,8.675 38.35,12.684 38.35,14.304 38.475,14.429 38.475,15.18 38.775,15.48 v1(38.784,15.48)
A11: Q11.2 R59.1 R60.2 U3.31 | length 47.4
  Top Layer w0.3: U3.31@36.5,16.1 v1(37.3,16.1) ; v1(50.8,49.4) 50.838,49.438 51.388,49.438 51.6,49.65 Q11.2@51.95,50
  Bottom Layer w0.15: v1(37.3,16.1) 37.765,16.565 40.19,16.565 40.546,16.921 42.193,16.921 46.12,20.848 46.12,27.845 46.929,28.654 cw(c49.258,19.604) 48.087,28.875 cw(c48.922,22.259) 48.927,28.927 49.2,29.2
  Bottom Layer w0.3: 49.2,29.2 49.2,31.124 49.376,31.3 52.224,31.3 52.4,31.476 52.4,47.8 v1(50.8,49.4)
A12: J9.4 U3.32 | length 26.6
  Top Layer w0.15: U3.32@36.5,16.5 37.071,16.5 37.116,16.545 37.829,16.545 38.404,15.97 38.923,15.97 39.53,15.363 39.53,15.107 39.855,14.782 39.855,13.341 39.159,12.645 38.869,12.645 38.755,12.531 38.755,12.184 38.455,11.884 38.455,11.516 38.771,11.2 44.324,11.2 44.532,10.992 44.579,10.992 44.796,10.775 46.238,10.775 46.521,11.058 46.917,11.058 46.925,11.05 47.05,11.05 52.653,16.653 J9.4@53.99,16.653
B0: R33.1 R34.1 U3.18 | length 11.7
  Top Layer w0.15: U3.18@33.3,12.9 33.293,12.893 33.293,11.643 33.67,11.266 33.67,11.261 33.881,11.05 34.425,11.05 R34.1@34.75,10.725 ; v1(34.15,10.625) 34.15,10.284 34.539,9.895 35.291,9.895 36.73,9.895 36.83,9.795 36.83,9.145 v1(37.5,8.475)
  Bottom Layer w0.15: v1(37.5,8.475) 38.405,9.38 38.405,9.54 38.42,9.555 38.42,9.945 38.405,9.96 38.405,11.205 v1(38.9,11.7)
B1: R25.2 R28.1 U3.19 | length 9.6
  Top Layer w0.12: R25.2@27,10.2 27.39,10.59 27.39,10.765 27.5,10.875 28.666,10.875 28.916,11.125 v1(28.925,11.125)
  Top Layer w0.15: R28.1@25.9,10.2 R25.2@27,10.2 ; U3.19@33.7,12.9 33.731,12.869 33.731,12.084 v1(33.763,12.053)
  Bottom Layer w0.12: v1(28.925,11.125) 28.96,11.125 29.21,11.375 33.114,11.375 33.763,12.024 v1(33.763,12.053)
B2: R25.1 U3.20 | length 16.5
  Top Layer w0.15: v1(24.9,10.22) 24.9,8.524 25.369,8.055 26.655,8.055 26.713,8.113 26.713,8.413 R25.1@27,8.7 ; U3.20@34.1,12.9 34.14,12.86 34.14,12.464 34.395,12.209 34.395,12.05 34.675,11.77 v1(34.675,11.675)
  Bottom Layer w0.15: v1(24.9,10.22) 24.918,10.22 25.163,9.975 32.075,9.975 33.708,11.608 34.608,11.608 v1(34.675,11.675)
B10: R26.1 U3.21 | length 25
  Top Layer w0.15: v1(23.995,10.875) 23.995,10.78 23.82,10.605 23.82,10.465 23.79,10.436 23.79,10.067 23.82,10.038 23.82,7.603 23.908,7.515 28.115,7.515 R26.1@29.3,8.7 ; U3.21@34.5,12.9 34.54,12.86 34.54,12.503 35.176,11.867 35.433,11.867 v1(35.5,11.8)
  Bottom Layer w0.15: v1(23.995,10.875) 23.928,10.808 23.676,10.808 23.655,10.787 23.655,10.016 23.971,9.7 32.25,9.7 33.725,11.175 34.875,11.175 v1(35.5,11.8)
B11: R26.2 R29.1 U3.22 | length 12.3
  Top Layer w0.15: R29.1@28.1,10.2 R26.2@29.3,10.2 29.475,10.375 29.475,11.225 v1(30.4,12.15) ; U3.22@34.9,12.9 34.94,12.86 34.94,12.503 35.193,12.25 36.51,12.25 v1(36.515,12.255)
  Bottom Layer w0.15: v1(30.4,12.15) 30.463,12.15 30.663,11.95 31.675,11.95 32.25,12.525 34.575,12.525 34.85,12.25 36.51,12.25 v1(36.515,12.255)
B12: R31.1 R35.1 U3.25 | length 16.1
  Top Layer w0.15: U3.25@36.5,13.7 36.785,13.7 36.958,13.527 36.958,13.317 v1(37.025,13.25) 37.025,13.188 37.34,12.873 37.34,10.856 37.42,10.776 37.42,10.28 v1(37.95,9.75) ; R31.1@40.5,12 R35.1@41.6,12 41.6,12.6 41.425,12.775 v1(41.425,12.85)
  Bottom Layer w0.15: v1(37.95,9.75) 36.975,8.775 36.975,8.2 37.145,8.03 37.684,8.03 38.7,9.046 38.7,9.418 38.715,9.433 38.715,10.067 38.7,10.082 38.7,10.763 38.7,10.825 38.788,10.913 v1(41.425,12.85)
B13: R55.1 U3.26 | length 37.6
  Top Layer w0.15: R55.1@8.63,5.73 ccw(c10.333,7.433) 10.333,5.025 13.627,5.025 15.947,5.074 15.964,5.079 18.601,5.769 20.905,6.346 20.923,6.35 21.458,6.35 21.576,6.378 21.601,6.403 25.134,6.403 25.159,6.428 25.267,6.428 cw(c29.86,-40.866) 34.469,6.426 cw(c34.439,6.133) 34.558,6.403 36.725,6.403 v1(36.725,7.475) ; U3.26@36.5,14.1 36.515,14.085 37.04,14.085 37.61,13.515 37.61,10.967 37.935,10.642 v1(37.935,10.576)
  Bottom Layer w0.15: v1(36.725,7.475) 36.68,7.52 36.68,9.321 v1(37.935,10.576)
B14: LED1.2 U3.27 | length 21.6
  Top Layer w0.15: U3.27@36.5,14.5 37.228,14.5 37.528,14.2 v1(37.6,14.2) 37.65,14.15 v1(38.825,14.15) ; v1(45,19) 45.975,19 v1(46.6,18.375) ; LED1.2@45.9,12.65 46.928,12.65 47.503,13.225 v1(48.45,13.225) ; v1(48.025,17.2) 49.175,16.05 v1@49.175,15.325
  Bottom Layer w0.15: v1(38.825,14.15) 41.163,16 42.175,16 v1@44.95,18.775 ; v1(46.6,18.375) 46.661,18.314 46.911,18.314 v1(48.025,17.2) ; v1(48.45,13.225) 48.45,13.3 49.123,13.973 v1(49.123,15.284)
B15: C4.1 J8.2 R2.2 R6.1 U3.28 | length 30
  Top Layer w0.15: U3.28@36.5,14.9 37.371,14.9 37.626,14.645 38,14.645 v1(38.03,14.675) ; v1(39.85,15.85) 39.85,15.169 40.439,14.58 44.551,14.58 45.143,15.172 47.109,15.172 47.412,15.475 v1(47.475,15.475) ; R2.2@40.5,15.15 41.6,15.15 R6.1@42.7,15.15
  Bottom Layer w0.15: v1(38.03,14.675) 38.03,14.77 38.205,14.945 38.205,15.767 38.363,15.925 39.775,15.925 v1(39.85,15.85) ; J8.2@43.7,6.9 44.671,7.871 47.521,7.871 49.075,9.425 49.075,12.659 48.987,12.747 48.252,12.747 47.972,13.027 47.972,13.423 48.252,13.703 48.424,13.703 48.774,14.052 48.774,14.176 v1(47.475,15.475)
C14: R53.1 U3.4 | length 67.7
  Top Layer w0.15: v1(28.955,17.057) 29.012,17 29.199,17 29.228,16.971 ; 29.242,16.958 29.3,16.9 U3.4@30.5,16.9
  Top Layer w0.2: 29.228,16.971 cw(c29.101,16.817) 29.242,16.958
  Top Layer w0.5: R53.1@-0.33,57.87 -0.33,57.83 v1(0.3,57.2) 0.3,55.5 3.7,52.1 3.7,47.7 4.8,46.6 7.7,46.6 10.9,43.4 v1(10.9,42.3)
  Bottom Layer w0.5: v1(10.9,42.3) 12.55,40.65 12.55,34.785 10.78,33.015 10.78,18.118 11.073,17.825 22.214,17.825 22.982,17.057 v1(28.955,17.057)
C15: R54.1 U3.5 | length 96.2
  Top Layer w0.15: v1(29.061,16.339) 29.119,16.396 29.296,16.396 29.4,16.5 U3.5@30.5,16.5
  Top Layer w0.3: v1(62,58.8) 62.5,59.3 R54.1@62.8,59.3
  Bottom Layer w0.3: v1(29.061,16.339) 29.115,16.339 29.215,16.439 29.299,16.439 29.475,16.614 29.475,17.274 29.172,17.577 23.197,17.577 22.43,18.345 12.804,18.345 12.628,18.521 12.628,34.081 24.147,45.6 44.2,45.6 55.5,56.9 60,56.9 61.9,58.8 v1(62,58.8)
D2: R56.1 U3.34 | length 33.6
  Top Layer w0.15: U3.34@36.5,17.3 37.247,17.3 ; 37.302,17.292 37.333,17.323 37.587,17.323 v1(37.63,17.366) ; v1(40.827,16.476) 44.024,16.476 v1(44.4,16.1) ; v1(47.65,8.9) 47.65,8.425 48.675,7.4 R56.1@50.1,7.4
  Top Layer w0.2: 37.247,17.3 cw(c37.247,17.1) 37.302,17.292
  Bottom Layer w0.15: v1(37.63,17.366) 37.601,17.366 36.855,16.62 36.855,15.916 37.116,15.655 37.673,15.655 38.313,16.295 40.646,16.295 v1(40.827,16.476) ; v1(44.4,16.1) 42.94,14.64 41.09,14.64 41.031,14.628 40.166,13.763 39.855,13.343 39.855,12.877 40.007,12.726 40.131,12.726 40.842,13.087 41.227,13.328 43.232,13.65 46.662,13.65 46.75,13.562 46.75,11.475 46.125,10.85 46.125,10.1 46.749,9.476 47.074,9.476 v1(47.65,8.9)
D3: J10.2 R47.1 U3.35 | length 65.7
  Top Layer w0.15: v1(26.758,11.367) 26.758,11.648 26.88,11.77 R47.1@26.85,11.8 ; U3.35@36.5,17.7 U3.35@36.876,17.7
  Top Layer w0.2: U3.35@36.876,17.7 ccw(c36.876,18.724) v1(37.6,18)
  Bottom Layer w0.15: 5.986,16.912 cw(c5.877,16.809) 6.024,16.841 ccw(c7.128,17.075) 6.036,16.791 cw(c5.89,16.755) 6.039,16.776 6.068,16.569 6.074,16.529 6.312,16.259 ; 6.142,17.673 6.159,17.656 6.161,17.656 cw(c7.128,17.075) 6.24,17.771 6.244,17.778 ccw(c6.116,17.856) 6.245,17.779 6.971,18.974 ; 6.993,18.993 J10.2@7.365,19.365 ; J10.2@7.507,19.424 9.183,19.424 10.03,18.576 10.03,18.203 10.878,17.355 21.72,17.355 26.83,12.245 29.367,12.245 30.697,13.575 33.175,13.575 35.758,13.575 35.875,13.692 35.875,16.275 v1(37.6,18) ; 7.944,16.26 8.274,16.637 8.362,16.725 10.603,16.725 10.613,16.715 21.41,16.715 v1(26.758,11.367)
  Bottom Layer w0.2: 5.986,16.912 cw(c7.128,17.075) 6.142,17.673 ; 6.312,16.259 ccw(c7.128,17.075) 7.944,16.26 ; 6.971,18.974 ccw(c6.851,19.134) 6.993,18.993 ; J10.2@7.365,19.365 cw(c7.507,19.224) J10.2@7.507,19.424